# Altium PCB K60基础组.PcbDoc
Units mil, origin at the board's own origin, x right, y up, seen from the top; angles counter-clockwise.
Board outline 2675 x 1775 mil, 2 copper layers (Top Layer, Bottom Layer); 28 components, 85 nets, 225 pads, 33 vias.
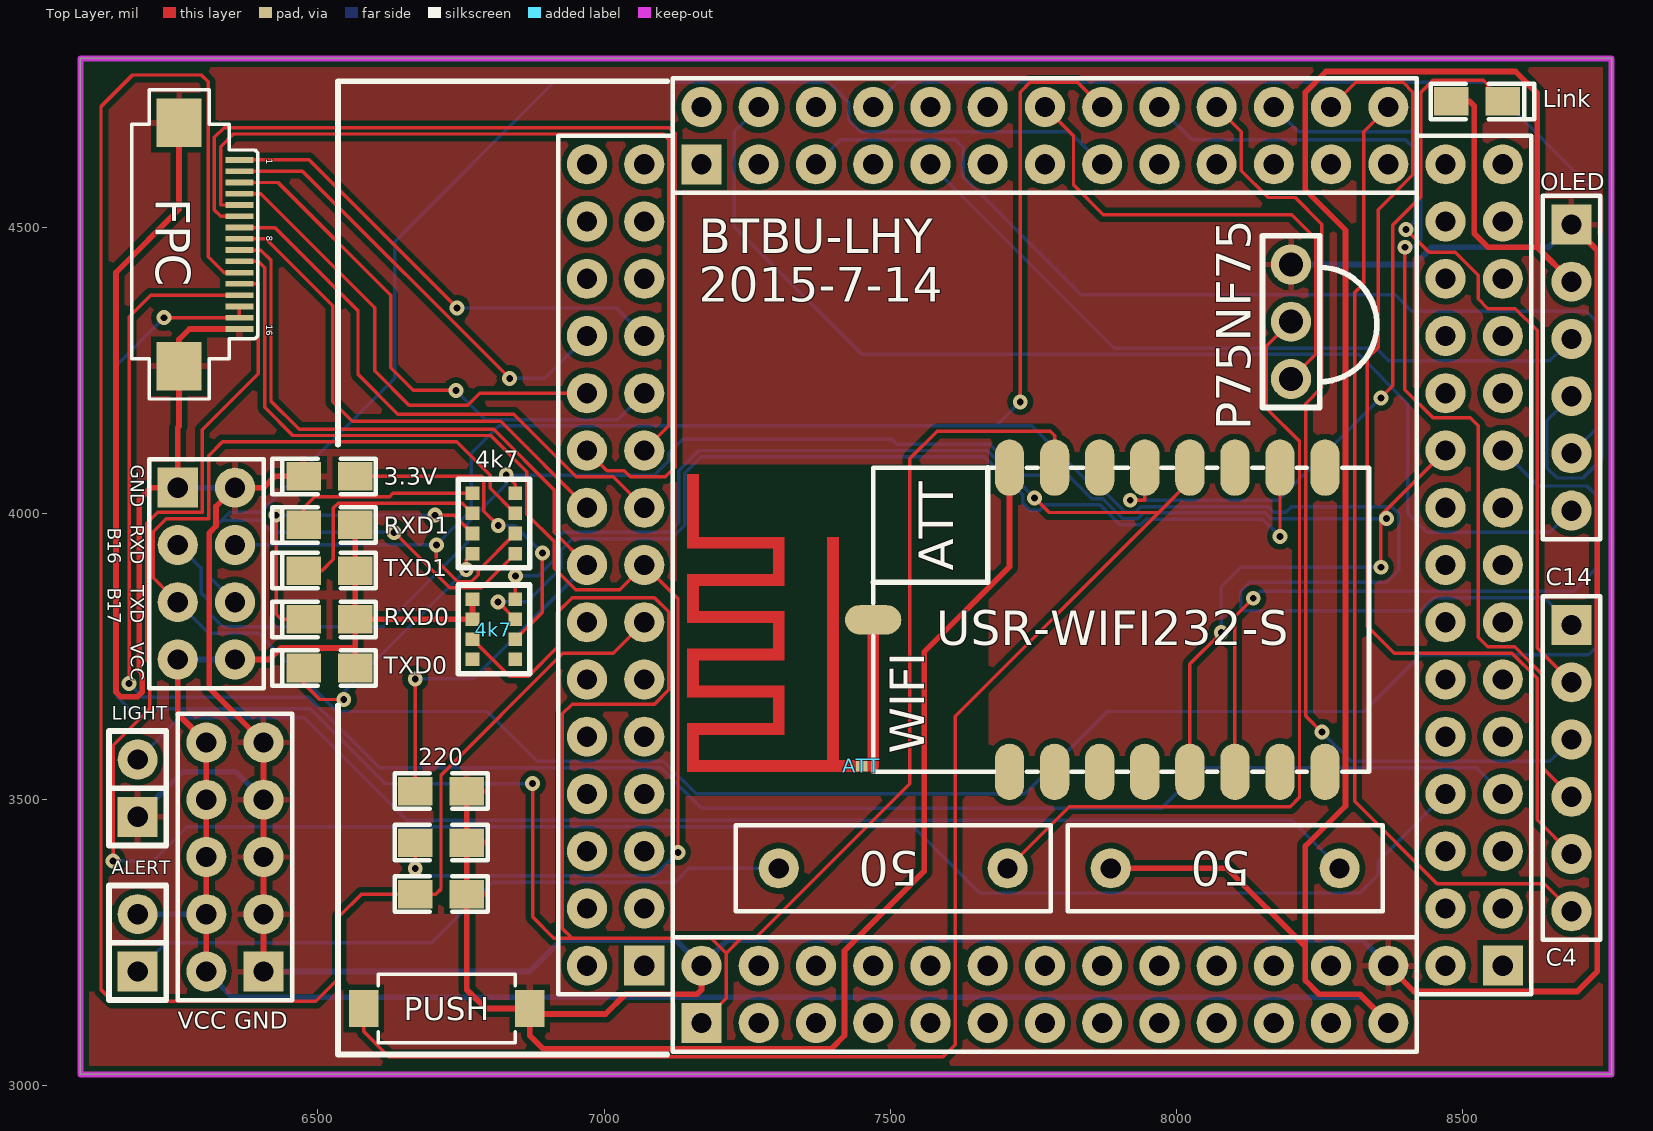
[diagram p0: Top Layer view]
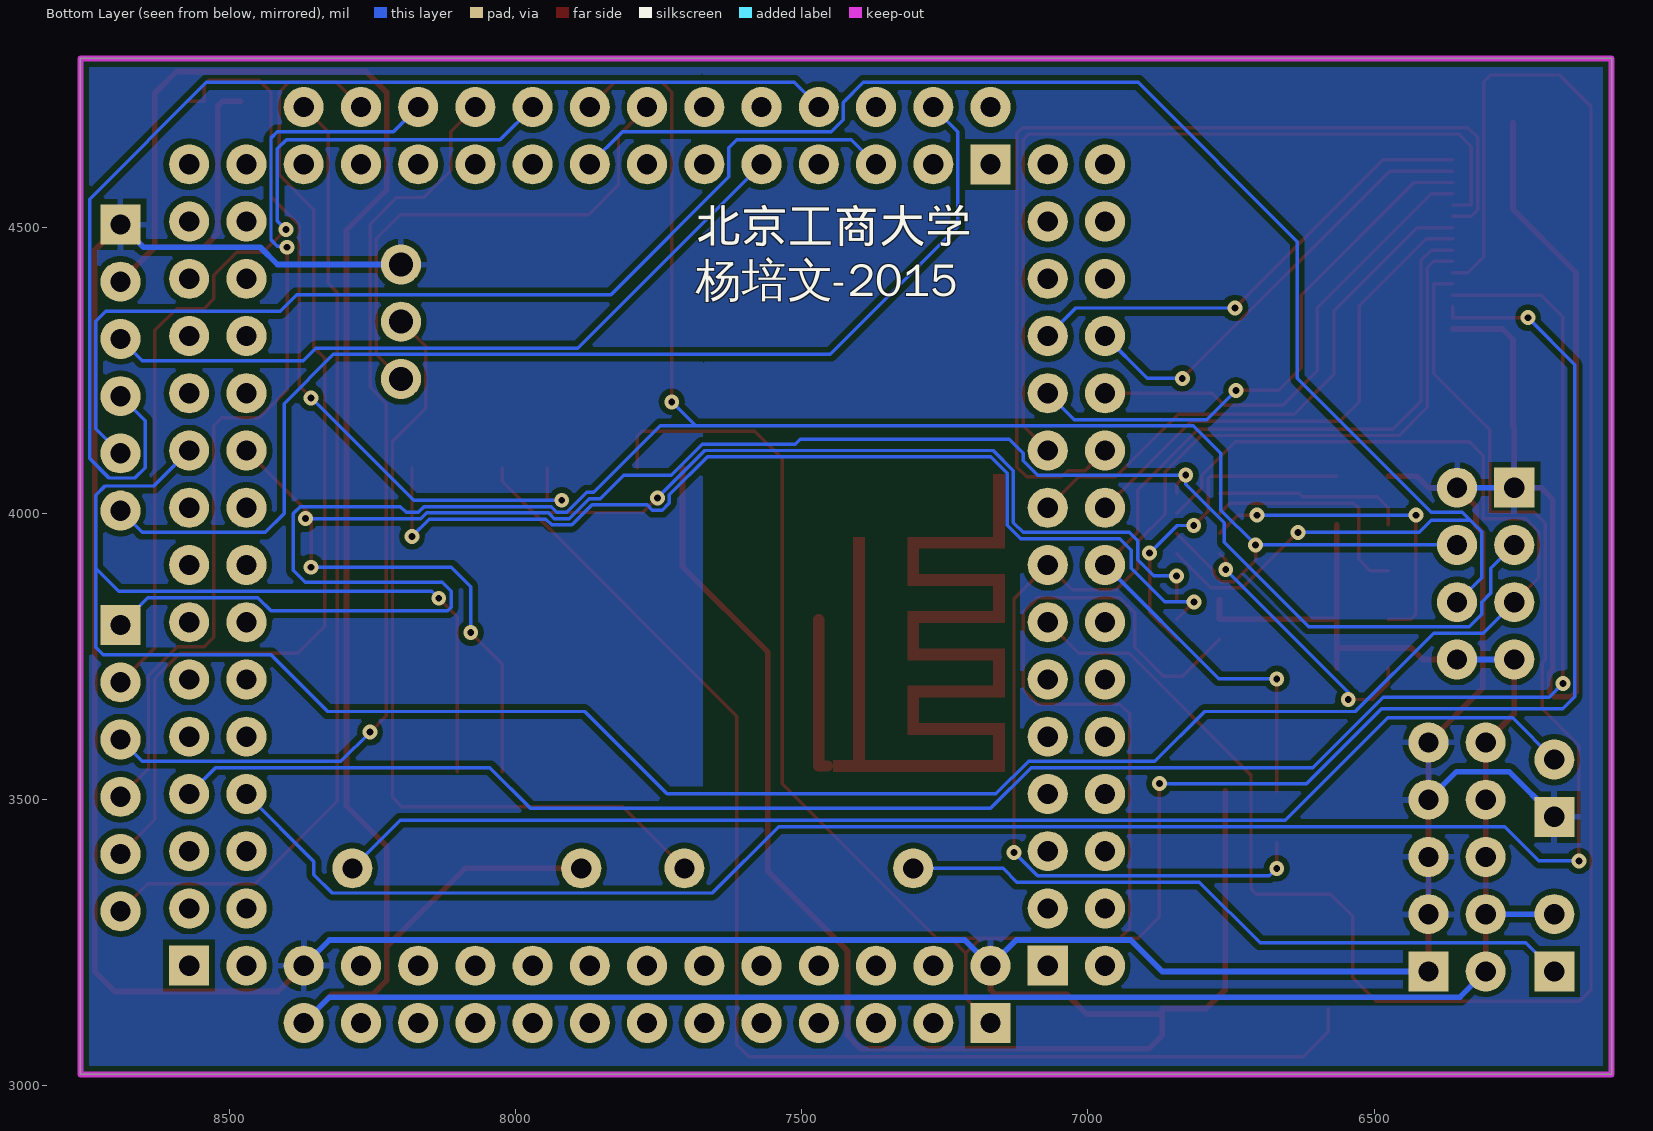
[diagram p1: Bottom Layer view, seen from below]

## Layer stack, top to bottom
Top Solder: solder mask 0.4, Solder Resist, Dk 3.5
Top Layer: signal copper 1.4
Dielectric1: dielectric 12.6, FR-4, Dk 4.8
Bottom Layer: signal copper 1.4
Bottom Solder: solder mask 0.4, Solder Resist, Dk 3.5

## Board outline
6085,3020 6085,4795 8760,4795 8760,3020

## Design rules (kind name [scope] priority, off if disabled: settings)
Clearance Clearance_1 [InNet('ANT')] p1: gap=0
Clearance [All] p2: gap=5 except(10: Arc-Poly Track-Poly SMDPad-Poly THPad-Poly Via-Poly Fill-Poly Poly-Poly)
MinimumSolderMaskSliver [All] p1: minsoldermaskwidth=3
PolygonConnect [All] p1: connectstyle=Relief reliefconductorwidth=10 reliefentries=4 polygonreliefangle="90 Angle" airgapwidth=10
RoutingVias [All] p1: holewidth=12 width=26 viastyle="Through Hole" minholewidth=12 minwidth=26 maxholewidth=12 maxwidth=26
ShortCircuit ShortCircuit_1 [InNet('ANT')] p1: allowed=TRUE
ShortCircuit [All] p2: allowed=FALSE
SilkToSilkClearance [All] p1: silktosilkclearance=0
SilkToSolderMaskClearance [IsPad] p1: minsilkscreentomaskgap=0 clearancetoexposedcopper=TRUE
SolderMaskExpansion [All] p1: expansion=4
Width ANT [InNet('ANT')] p1: maxlimit=20 minlimit=20 preferedwidth=20
Width GND [InNet('GND')] p2: maxlimit=10 minlimit=10 preferedwidth=10
Width VCC [InNet('VCC')] p3: maxlimit=10 minlimit=10 preferedwidth=10
Width [All] p4: maxlimit=10 minlimit=6 preferedwidth=6
26 further rules are at their usual default settings.

## Components (designator, comment, footprint, x,y, rotation, side; value= is the part's Value field where it differs from the comment)
3.3V "Comment" D0805 6565,4065 r180 top
4k7 "Comment" 排阻0603 6775,3930 r90 top
4k7 "Comment" 排阻0603 6775,3745 r90 top
50 "Comment" 普通电阻 8085,3380 r180 top
50 "Comment" 普通电阻 7505,3380 r180 top
220 "Comment" 0805 6670,3515 r180 top
ALERT "Comment" POWER 6185,3200 r90 top
ATT "Comment" 天线 7450,3558.84 r90 top
FPC "Comment" FPC 6310,4470 r90 top
LIGHT "Comment" POWER 6185,3470 r90 top
Link "Comment" D0805 8480,4720 r0 top
OLED "Comment" HDR1X6#1 8690,4505 r270 top
P75NF75 "TO-220" 红外接收头 8355,4455 r180 top
RXD0 "Comment" D0805 6565,3815 r180 top
RXD1 "Comment" D0805 6565,3980 r180 top
TXD0 "Comment" D0805 6565,3730 r180 top
TXD1 "Comment" D0805 6565,3900 r180 top
"VCC GND" "Comment" POWER5 6405,3200 r90 top
WIFI "Comment" USR-WIFI232-S 7470,4080 r90 top
? "Comment" HDR2X13#1 7170,3110 r0 top
? "Comment" HDR2X15#1 7070,3210 r90 top
? "Comment" HDR2X15#2 8570,3210 r90 top
? "Comment" HDR2X13#2 7170,4610 r0 top
? "Comment" UART2 6255,4045 r270 top
? "Comment" 0805 6670,3425 r180 top
? "Comment" 0805 6670,3335 r180 top
? "Comment" HDR1X6#2 8690,3805 r270 top
? "Comment" 贴片按键 6725,3135 r0 top

## Footprints (in the part's own frame and the unit in brackets; to place one, negate y for a bottom-side part, rotate by r counter-clockwise, add the part's x,y. Pads: shape width x height; smd on the part's side, far side on the other; paste and mask are expansions set on the pad)
0805 [mil]
  rect 60x50 smd: 1(0,0) 2(-90,0)
  silkscreen extent -127,-31 36,31, body extent -84,-25 -6,25, height 22
D0805 [mil]
  rect 60x50 smd: +(0,0) GND(90,0)
  silkscreen extent -36,-31 145,31, body extent 5,-25 85,25, height 43
FPC [mm] "0.5间距 抽屉式 16P"
  rect 2.159x2 smd: 0(-5.4,1.338) 0(5.4,1.338)
  rect 0.254x1.25 smd mask+0.05: 1(3.75,-1.338) 2(3.25,-1.338) 3(2.75,-1.338) 4(2.25,-1.338) 5(1.75,-1.338) 6(1.25,-1.338) 7(0.75,-1.338) 8(0.25,-1.338) 9(-0.25,-1.338) 10(-0.75,-1.338) 11(-1.25,-1.338) 12(-1.75,-1.338) 13(-2.25,-1.338) 14(-2.75,-1.338) 15(-3.25,-1.338) 16(-3.75,-1.338)
  silkscreen extent -6.86,-2.16 6.86,3.43, body extent -4.87,-0.63 5.13,3.18, height 0.82
HDR1X6#1 [mil] "Connector; Header; 6 Position"
  round 70 hole 35.43: 5(400,0) 6(500,0) D0(200,0) D1(300,0) VCC(100,0)
  rect 70x70 hole 35.43: GND(0,0)
  silkscreen extent -50,-50 550,50
HDR1X6#2 [mil] "Connector; Header; 6 Position"
  rect 70x70 hole 35.43: 1(0,0)
  round 70 hole 35.43: 2(100,0) 3(200,0) 4(300,0) 5(400,0) 6(500,0)
  silkscreen extent -50,-50 550,50
HDR2X13#1 [mil] "Connector; Header; 13x2 Position"
  rect 70x70 hole 35.43: 3.3(0,0)
  round 70 hole 35.43: A4(500,100) A5(500,0) A6(600,100) A7(600,0) A8(700,100) A9(700,0) A10(800,100) A11(800,0) A12(900,100) A13(900,0) A14(1000,100) A15(1000,0) A16(1100,100) A17(1100,0) DAC0(100,100) DAC1(100,0) E24(200,0) E25(300,100) E26(300,0) E27(400,100) E28(400,0) GND(0,100) GND(1200,100) VBAT(200,100) VCC(1200,0)
  silkscreen extent -50,-50 1250,150
HDR2X13#2 [mil] "Connector; Header; 13x2 Position"
  round 70 hole 35.43: C4(1200,100) C5(1200,0) C6(1100,100) C7(1100,0) C8(1000,100) C9(1000,0) C10(900,100) C11(900,0) C12(800,100) C13(800,0) C14(700,100) C15(700,0) C16(600,100) C17(600,0) C18(500,100) C19(500,0) D0(400,100) D1(400,0) D2(300,100) D3(300,0) D4(200,100) D5(200,0) D6(100,100) D7(100,0) D8(0,100)
  rect 70x70 hole 35.43: D9(0,0)
  silkscreen extent -50,-50 1250,150
HDR2X15#1 [mil] "Connector; Header; 15x2 Position"
  round 70 hole 35.43: 0S16(0,100) AD0DM0(200,100) AD0DM1(400,100) AD0DP0(300,0) AD0DP1(500,0) AD1DM0(100,100) AD1DM1(300,100) AD1DP1(400,0) AD1DP6(200,0) AD1S16(100,0) D10(1400,0) D11(1400,100) D12(1300,0) D13(1300,100) D14(1200,0) D15(1200,100) E0(1100,0) E1(1100,100) E2(1000,0) E3(1000,100) E4(900,0) E5(900,100) E6(800,0) E7(800,100) E8(700,0) E9(700,100) E10(600,0) E11(600,100) E12(500,100)
  rect 70x70 hole 35.43: 1S16(0,0)
  silkscreen extent -50,-50 1450,150
HDR2X15#2 [mil] "Connector; Header; 15x2 Position"
  round 70 hole 35.43: A24(0,100) A26(100,100) A27(100,0) A28(200,100) A29(200,0) B0(300,100) B1(300,0) B2(400,100) B3(400,0) B4(500,100) B5(500,0) B6(600,100) B7(600,0) B8(700,100) B9(700,0) B10(800,100) B11(800,0) B16(900,100) B17(900,0) B18(1000,100) B19(1000,0) B20(1100,100) B21(1100,0) B22(1200,100) B23(1200,0) C0(1300,0) C1(1300,100) C2(1400,0) C3(1400,100)
  rect 70x70 hole 35.43: A25(0,0)
  silkscreen extent -50,-50 1450,150
POWER [mil]
  rect 70x70 hole 35.43: GND(0,0)
  round 70 hole 35.43: VCC(100,0)
  silkscreen extent -50,-50 150,50, body extent -50,-50 150,50, height 336
POWER5 [mil] "Connector; Header; 5x2 Position"
  rect 70x70 hole 35.43: 1(0,0)
  round 70 hole 35.43: 2(0,100) 3(100,0) 4(100,100) 5(200,0) 6(200,100) 7(300,0) 8(300,100) 9(400,0) 10(400,100)
  silkscreen extent -50,-50 450,150, body extent -50,-50 450,150, height 336
UART2 [mil] "Connector; Header; 4x2 Position"
  rect 70x70 hole 35.43: 1(0,0)
  round 70 hole 35.43: 2(0,100) 3(100,0) 4(100,100) 5(200,0) 6(200,100) 7(300,0) 8(300,100)
  silkscreen extent -50,-50 350,150, body extent -50,-50 350,150, height 336
USR-WIFI232-S [mm]
  oval 2.5x1.3 smd: 1(-13.5,-6.051) 2(-13.5,-8.051) 3(-13.5,-10.051) 4(-13.5,-12.051) 7(-13.5,-18.051) 8(-13.5,-20.051) DVDD(0,-8.051) GND(0,-6.051) GPIO9(0,-20.051) NLINK(0,-12.051) READY(0,-16.051) RELOAD(0,-14.051) RESET(0,-18.051) RXD(-13.5,-16.051) TXD(-13.5,-14.051) WPS(0,-10.051)
  oval 1.3x2.5 smd: 17(-6.75,0)
  silkscreen extent -13.5,-22 0,0, body extent -13.46,-21.97 0,0, height 4.2
天线 [mm]
  rect 0.5x0.5 smd: 1(0,0)
  Top Layer region: -0.254,7.747 -0.254,0.127 0.254,0.127 0.254,1.016 10.16,1.016 10.16,1.524 0.254,1.524 0.254,7.239 1.397,7.239 1.397,3.429 3.556,3.429 3.556,7.239 4.699,7.239 4.699,3.429 6.858,3.429 6.858,7.239 8.001,7.239 8.001,3.429 10.16,3.429 10.16,7.239 12.954,7.239 12.954,7.747 9.652,7.747 9.652,3.937 8.509,3.937 8.509,7.747 6.35,7.747 6.35,3.937 5.207,3.937 5.207,7.747 3.048,7.747 3.048,3.937 1.905,3.937 1.905,7.747
排阻0603 [mm]
  rect 0.6x0.6 smd: 1(0,-1.778) 2(0,0.127) 3(0.889,-1.778) 4(0.889,0.127) 5(1.778,-1.778) 6(1.778,0.127) 7(2.667,-1.778) 8(2.667,0.127)
  silkscreen extent -0.64,-2.41 3.3,0.76, body extent -0.25,-1.6 2.92,0, height 0.55
普通电阻 [mil] "Radial Cap, Thru-Hole; 2 Leads; 0.4 in Pin Spacing"
  round 70 hole 35: 1(-200,0) 2(200,0)
  silkscreen extent -275,-75 275,75, body extent -214,-50 214,50, height 129
红外接收头 [mil]
  round 70 hole 42: D(155,120) G(155,220) S(155,20)
  silkscreen extent 5,-30 205,270, body extent 94,-85 306,314, height 787
贴片按键 [mil]
  rect 51.18x65 smd: 1(145,0) 2(-145,0)
  silkscreen extent -120,-60 120,60, body extent -130,-65 130,61, height 75

## Via types
v1: diameter 26, hole 12, Top Layer to Bottom Layer, tented both sides, 33 vias

## Nets (pads, with @x,y where several pads share a name; then routed paths per layer and width w, separated by ;. In a path a pad name is that pad's centre, name@x,y a point inside that pad or via, vN(x,y) a via of type N, cw(c..) or ccw(c..) an arc to the next point about the centre after c; other vN are vias at no path point)
3.3: 4k7.4@6770,3780 ?.3.3 FPC.14 FPC.15 WIFI.DVDD | length 4979.7
  Top Layer w6: v1(6231.05,4342.05) FPC.15 FPC.14 ; 4k7.4@6770,3780 6834,3716 6868,3716 6918,3766 6918,3827 6944,3853 7088,3853 7113,3828 7113,3692 7088,3667 6944,3667 6927,3650 6927,3275 6944,3258 ; v1(6875,3528) 6875,3295 6912,3258 6944,3258 ; ?.3.3 7213,3153 7213,3232 ; WIFI.DVDD 7786.96,4136 7778.96,4144 7582,4144 7534,4096 7534,3528 7264,3258 7239,3258 ; 6944,3258 7187,3258 ; 7187,3258 7239,3258 ; 7187,3258 7213,3232 ; 7213,3232 7239,3258
  Bottom Layer w6: v1(6231.05,4342.05) 6149,4260 6149,3680 6170,3659 6487,3659 6618,3528 v1(6875,3528)
A4: ?.A4
A5: ?.A5
A6: ?.A6
A7: ?.A7
A8: ?.A8
A9: ?.A9
A10: ?.A10
A11: ?.A11
A12: ?.A12
A13: ?.A13
A14: ?.A14
A15: ?.A15
A16: ?.A16
A17: ?.A17
ALERT: 50.2@7305,3380 ALERT.GND | length 1194.6
  Bottom Layer w6: ALERT.GND 6235,3250 6699,3250 6805,3356 7124,3356 7148,3380 50.2@7305,3380
ALERT2: 50.1@7705,3380 P75NF75.D | length 1433.9
  Top Layer w6: 50.1@7705,3380 7812.81,3487.81 8198.62,3487.81 8214.81,3504 8214.81,4126.19 8157,4184 8157,4292 P75NF75.D
ANT: ATT.1 WIFI.17 | length 270.4
  Top Layer w20: ATT.1@7455,3558.84 7470,3558.84 WIFI.17
B0: ?.B0 FPC.12 | length 3682.5
  Top Layer w6: v1(6142,3393) 6142,3595 6206,3659 6206,3739 6201,3744 6201,3983 6220,4002 6298,4002 6298,4146 6396,4244 6396,4401.1 FPC.12
  Bottom Layer w6: v1(6142,3393) 6212,3393 6272,3453 7540,3453 7656,3337 8320,3337 8352,3369 8352,3392 ?.B0
B1: ?.B1 FPC.13 | length 3387.6
  Top Layer w6: v1(6170,3703) 6170,4343.42 6208,4381.42 FPC.13
  Bottom Layer w6: v1(6170,3703) 6194,3679 6484,3679 6607,3556 7099,3556 7170,3485 7973.75,3485 8044.75,3556 8524,3556 ?.B1
B2: ?.B2
B3: ?.B3
B4: ?.B4
B5: ?.B5
B6: ?.B6
B7: ?.B7
B8: ?.B8
B9: ?.B9
B10: ?.B10
B11: ?.B11
B16: 4k7.7@6845,4035 ?.3@6255,3945 ?.B16 WIFI.TXD | length 3392.3
  Top Layer w6: v1(6829,4067) 6845,4051 4k7.7@6845,4035 ; WIFI.TXD 8023.18,3737 v1(8078,3791.82) ; v1(8357,3906) 8357,3997 8367,4007 ; v1(8367,3991) 8367,4007 ; ?.B16 8367,4007
  Bottom Layer w6: ?.3@6255,3945 6296,3904 6296,3861 6312,3845 6312,3824 6334,3802 6614,3802 6761.94,3949.94 6761.94,3983.94 6829,4051 v1(6829,4067) 7087.81,4067 7113,4092.19 7113,4105.5 7137.5,4130 7502.5,4130 7511.5,4121 7673.56,4121 7727.56,4067 7811,4067 7852,4026 7870.75,4026 7905.75,3991 7932.25,3991 7942.25,4001 8155.22,4001 8165.22,3991 v1(8367,3991) ; v1(8078,3791.82) 8078,3872 8112,3906 v1(8357,3906)
B17: 4k7.5@6845,4000 ?.5@6255,3845 ?.B17 WIFI.RXD | length 5089.9
  Top Layer w6: ?.5@6255,3845 6212,3888 6212,3968 6235,3991 6309,3991 6309,4101 6333.22,4125.22 6742.29,4125.22 6800.81,4066.7 6800.81,4044.19 4k7.5@6845,4000 ; WIFI.RXD 8101.92,3819.92 v1(8133.92,3851.92)
  Bottom Layer w6: ?.5@6255,3845 6309,3791 6396,3791 6533,3654 6796,3654 6883,3567 6987.81,3567 7103.56,3567 7160.56,3510 7735.25,3510 7879.25,3654 8328,3654 8427,3753 8720,3753 8733,3766 8733,3904 ; v1(8133.92,3851.92) 8146,3864 8693,3864 8733,3904 ; ?.B17 8632,4048 8717,4048 8733,4032 8733,3904
C0: ?.C0
C1: ?.C1
C2: ?.C2
C3: ?.C3
C4: ?.6@8690,3305 ?.C4 | length 1696
  Top Layer w6: ?.C4 8327,4667 8327,4402 8311,4386 8311,3497 8455,3353 8642,3353 ?.6@8690,3305
C5: ?.C5
C6: ?.5@8690,3405 ?.C6 | length 1800.5
  Top Layer w6: ?.C6 8313,4753 8396,4753 8413,4736 8413,4591.73 8352,4530.73 8352,4290 8333,4271 8333,3803 8380,3756 8586,3756 8630,3712 8630,3465 ?.5@8690,3405
C7: 
C8: ?.4@8690,3505 ?.C8 | length 1636.6
  Top Layer w6: v1(8399,4465) 8399,4216 8448,4167 8513,4167 8527,4153 8527,3784 8544,3767 8590.56,3767 8641,3716.56 8641,3554 ?.4@8690,3505
  Bottom Layer w6: ?.C8 8213,4667 8416,4667 8427,4656 8427,4478 8416,4467 8401,4467 v1(8399,4465)
C9: ?.C9
C10: ?.3@8690,3605 ?.C10 | length 1692
  Top Layer w6: ?.C10 8113,4667 8113,4599 8160,4552 8207,4552 8254,4505 8254,4220.19 8225.81,4192 8225.81,3646.19 v1(8254,3618)
  Bottom Layer w6: v1(8254,3618) 8305,3567 8652,3567 ?.3@8690,3605
C11: ?.C11
C12: ?.2@8690,3705 ?.C12 | length 1589.2
  Top Layer w6: v1(8401,4496) 8441,4456 8487,4456 8527,4416 8527,4375 8544,4358 8592,4358 8630,4320 8630,3765 ?.2@8690,3705
  Bottom Layer w6: ?.C12 8027,4653 8400,4653 8416,4637 8416,4511 v1(8401,4496)
C13: ?.C13
C14: 4k7.3@6845,3965 ?.1@8690,3805 ?.4@6355,3945 ?.C14 | length 4272.8
  Top Layer w6: v1(6707,3945) 6707,3918 6744,3881 6768,3881 6780,3893 6780,3900 4k7.3@6845,3965 ; v1(7727,4195) 7727,4736 7744,4753 7827,4753 ?.C14
  Bottom Layer w6: ?.4@6355,3945 v1(6707,3945) 6768,4006 6768,4105 6816,4153 7685,4153 ; v1(7727,4195) 7685,4153 ; ?.1@8690,3805 8642,3853 8450,3853 8427,3830 8118,3830 8112,3836 8112,3864 8128,3880 8367,3880 8388,3901 8388,4000 8376,4012 8201,4012 8191,4002 8169.77,4002 8159.77,4012 7937.7,4012 7927.7,4002 7910.3,4002 7875.3,4037 7863,4037 7747,4153 7685,4153
C15: 4k7.1@6845,3930 ?.6@6355,3845 ?.C15 | length 2827.5
  Top Layer w6: v1(6633,3967) 6730,3870 6785,3870 4k7.1@6845,3930
  Bottom Layer w6: ?.6@6355,3845 6312,3888 6312,3968 6332,3988 ; v1(6633,3967) 6421,3967 6400,3988 6332,3988 ; ?.C15 7813,4667 7448,4667 7427,4688 7427,4718 7392,4753 6912,4753 6634,4475 6634,4236 6400,4002 6346,4002 6332,3988
C16: ?.C16 P75NF75.G | length 881.5
  Top Layer w6: ?.C16 7820,4660 7820,4574 7872,4522 8201,4522 8243,4480 8243,4278 P75NF75.G
C17: ?.C17
C18: ?.C18
C19: ?.C19
CAMPULL: 
D0: ?.D0
D1: ?.D1 OLED.D0 | length 1277.8
  Bottom Layer w6: ?.D1 7891,4289 8349,4289 8371,4267 8652,4267 OLED.D0
D2: ?.D2 OLED.D1 | length 2090.7
  Bottom Layer w6: ?.D2 7513,4753 8540,4753 8744,4549 8744,4096 8710,4062 8665,4062 8647,4080 8647,4162 OLED.D1
D3: ?.D3
D4: ?.D4
D5: ?.D5 OLED.5 | length 1790.8
  Bottom Layer w6: ?.D5 7413,4653 7613,4653 7627,4639 7627,4588 7833,4382 8382,4382 8411,4353 8716,4353 8733,4336 8733,4148 OLED.5
D6: ?.D6 OLED.6 | length 2039.2
  Bottom Layer w6: ?.D6 7227,4667 7227,4501 7450,4278 8318,4278 8404,4192 8404,4000 8437,3967 8652,3967 OLED.6
D7: ?.D7
D8: ?.D8
D9: ?.D9
E0: ?.E0 FPC.1 | length 834.8
  Top Layer w6: FPC.1 6484.36,4617.64 v1(6743,4359)
  Bottom Layer w6: v1(6743,4359) 7021,4359 ?.E0
E1: ?.E1 FPC.2 | length 787.9
  Top Layer w6: FPC.2 6473,4597.95 v1(6834.95,4236)
  Bottom Layer w6: v1(6834.95,4236) 6896,4236 ?.E1
E2: ?.E2 FPC.3 | length 972.2
  Top Layer w6: FPC.3 6430.23,4578.27 6627,4381.5 6627,4254.78 6666.78,4215 v1(6741,4215)
  Bottom Layer w6: v1(6741,4215) 6792,4164 7024,4164 ?.E2
E3: ?.E3 FPC.4 | length 833.9
  Top Layer w6: FPC.4 6400,4558.58 6599,4359.58 6599,4249 6659,4189 6762,4189 6783,4210 ?.E3
E4: ?.E4 FPC.5 | length 1491.8
  Top Layer w6: FPC.5 6330,4538.9 6330,4641 6352,4663 7103,4663 7113,4653 7113,4153 ?.E4
E5: ?.E5 FPC.6 | length 1754.3
  Top Layer w6: FPC.6 6330,4519.21 6319,4530.21 6319,4657 6336,4674 7114,4674 7124,4664 7124,4081 7107,4064 7046,4064 7035,4075 7005,4075 ?.E5
E6: ?.E6 FPC.7 | length 975.4
  Top Layer w6: FPC.7 6425,4499.53 6570,4354.53 6570,4243 6639.72,4173.28 6841.72,4173.28 6951,4064 7016,4064 ?.E6
E7: ?.E7 FPC.8 | length 900.3
  Top Layer w6: FPC.8 6409,4479.84 6526,4362.84 6526,4195 6560,4161 6819,4161 ?.E7
E8: ?.1@6670,3425 ?.E8 FPC.10 | length 2229.5
  Top Layer w6: FPC.10 6396,4440.47 6407,4429.47 6407,4185.22 6456,4136.22 6801.78,4136.22 6865,4073 6865,3999 6913,3951 6913,3904 6950,3867 7027,3867 ?.E8 7129,3851 v1(7129,3408) ; v1(6670,3380) ?.1@6670,3425
  Bottom Layer w6: v1(6670,3380) 6683,3367 7088,3367 v1(7129,3408)
E9: 220.1 ?.E9 FPC.9 | length 1601.1
  Top Layer w6: FPC.9 6400,4460.16 6418,4442.16 6418,4196.22 6467,4147.22 6806.78,4147.22 6913,4041 6913,3967 ?.E9 ; 220.1 v1(6670,3711)
  Bottom Layer w6: v1(6670,3711) 6771,3711 ?.E9
E10: ?.1@6670,3335 ?.E10 FPC.11 | length 3540
  Top Layer w6: FPC.11 6336,4420.79 6308,4448.79 6308,4754 6296,4766 6176,4766 6121,4711 6121,3168 6141,3148 6496,3148 6537,3189 6537,3296 6576,3335 6670,3335 6706,3335 6715,3344 6715,3543 6928,3756 7016,3756 ?.E10
GND: 3.3V.GND 220.2 "VCC GND.1" "VCC GND.3" "VCC GND.5" "VCC GND.7" "VCC GND.9" ?.1@6255,4045 ?.1@6870,3135 ?.2@6355,4045 ?.2@6760,3335 ?.2@6760,3425 ?.GND FPC.0 FPC.16 LIGHT.GND OLED.GND P75NF75.S WIFI.GND | length 10126.7
  Top Layer w10: FPC.0@6257.34,4682.6 6257.34,4531.34 6147,4421 6147,3688 6155,3680 6185,3680 6193,3688 6193,3721 6188,3726 6188,4025 6208,4045 6255,4045 6255,4150 6257.34,4152.34 6257.34,4257.4 6257.34,4304 6275.7,4322.36 FPC.16 ; 6405,3200 6405,3300 6405,3400 6405,3500 6405,3600 6310,3695 6310,3966 6322,3978 6322,4012 6355,4045 6405,4045 6425,4065 3.3V.GND ; 220.2 6760,3425 6760,3335 6760,3168 6793,3135 6870,3135 ?.1@6870,3125.46 ; ?.GND@7170,3210 7170,3168 7162,3160 7036.7,3160 7002.15,3125.46 ?.1@6870,3125.46 ; WIFI.GND 7708.22,3907 7559,3757.78 7559,3375 7420,3236 7420,3088 7397,3065 6893,3065 6870,3088 ?.1@6870,3125.46 ; ?.GND@8370,3210 8415,3165 8700,3165 8735,3200 8735,4460 OLED.GND
  Bottom Layer w10: LIGHT.GND 6264,3549 6356,3549 6405,3500 ; ?.1@6255,4045 ?.2@6355,4045 ; 6405,3200 6870,3200 6925,3255 7125,3255 7170,3210 7215,3255 8325,3255 ?.GND@8370,3210 ; P75NF75.S 8415.86,4435 8445.86,4465 8650,4465 OLED.GND
LED-3.3: 3.3V.+ 4k7.3@6845,3780 | length 586.4
  Top Layer w6: 3.3V.+ 6786,4065 6789.81,4061.19 6789.81,4004.19 v1(6815,3979) ; 4k7.3@6845,3780 6892,3827 v1(6892,3931)
  Bottom Layer w6: v1(6815,3979) 6844,3979 v1(6892,3931)
LED-RXD0: 4k7.4@6770,3965 RXD0.GND | length 581
  Top Layer w6: v1(6427,3997) 6427,3824 6436,3815 RXD0.GND ; v1(6704.61,3997) 6738,3997 4k7.4@6770,3965
  Bottom Layer w6: v1(6427,3997) v1(6704.61,3997)
LED-RXD1: 4k7.8@6770,4035 RXD1.GND | length 335.4
  Top Layer w6: RXD1.GND 6475,4010 6494.55,4029.55 6625.55,4029.55 6631,4035 4k7.8@6770,4035
LED-TXD0: 4k7.2@6770,3930 TXD0.GND | length 456.8
  Top Layer w6: TXD0.GND 6475,3703 6503,3675 v1(6545,3675) ; v1(6759,3902) 6759,3919 4k7.2@6770,3930
  Bottom Layer w6: v1(6545,3675) 6545,3688 v1(6759,3902)
LED-TXD1: 4k7.6@6770,4000 TXD1.GND | length 403.8
  Top Layer w6: TXD1.GND 6507,3900 6527,3920 6527,4009.55 6535.45,4018 6752,4018 4k7.6@6770,4000
LIGHT: 50.1@8285,3380 LIGHT.VCC | length 2239.2
  Bottom Layer w6: LIGHT.VCC 6258,3643 6475.81,3643 6654.81,3464 8201,3464 50.1@8285,3380
VCC: 4k7.6@6770,3815 4k7.8@6770,3850 50.2@7885,3380 "VCC GND.2" "VCC GND.4" "VCC GND.6" "VCC GND.8" "VCC GND.10" ?.7 ?.8 ?.VCC ALERT.VCC Link.+ OLED.VCC RXD0.+ RXD1.+ TXD0.+ TXD1.+ | length 6954.4
  Top Layer w10: ?.7 6255,3650 6305,3600 6305,3500 6305,3400 6305,3300 6305,3200 ; ?.8 6415,3745 6435,3765 6565,3765 ; TXD0.+ 6565,3765 ; RXD1.+ TXD1.+ RXD0.+ ; 4k7.8@6770,3850 6770,3815 RXD0.+ ; 50.2@7885,3380 8088,3380 8225,3243 ; ?.VCC 8320,3160 8249,3160 8225,3184 8225,3243 ; Link.+ 8512,4720 8520,4712 8520,4489 8544,4465 8630,4465 ; OLED.VCC 8630,4465 ; 6565,3765 RXD0.+ ; 8225,3243 8225,3419 8295,3489 8295,4495 8225,4565 8225,4736 8261,4772 8592,4772 8630,4734 8630,4465
  Bottom Layer w10: ALERT.VCC 6305,3300 ; ?.7 ?.8 ; 6305,3200 6350,3155 8325,3155 ?.VCC
WIFI-LINK: Link.GND WIFI.NLINK | length 1341.6
  Top Layer w6: v1(7919,4023) 7944.44,4023 WIFI.NLINK ; v1(8357,4202) 8378,4223 8378,4504 8427,4553 8427,4736 8448,4757 8536,4757 8544,4749 8544,4720 Link.GND
  Bottom Layer w6: v1(7919,4023) 8178,4023 v1(8357,4202)
WIFI-RELOAD: 4k7.7@6845,3850 ?.2@6580,3135 WIFI.RELOAD | length 3650.9
  Top Layer w6: ?.2@6580,3135 6580,3095 6624,3051 7592,3051 7613,3072 7613,3645.82 7968.88,4001.7 ; 4k7.7@6845,3850 v1(6845,3891) ; v1(7752,4027) 7777.3,4001.7 7968.88,4001.7 ; WIFI.RELOAD 8023.18,4056 7968.88,4001.7
  Bottom Layer w6: v1(6845,3891) 6885,3891 6913,3919 6913,3952 6928,3967 7113,3967 7130,3984 7130,4075 7165,4110 7669,4110 v1(7752,4027)
WIFI-RESET: 4k7.5@6845,3815 WIFI.RESET | length 1787.9
  Top Layer w6: v1(6814.5,3845.5) 4k7.5@6845,3815 ; v1(8180.66,3960) WIFI.RESET
  Bottom Layer w6: v1(6814.5,3845.5) 6865.5,3845.5 6924,3904 6924,3936 6944,3956 7117.56,3956 7141,3979.44 7141,4070.44 7169.56,4099 7664.44,4099 7731,4032.44 7731,4018.3 7743.3,4006 7760.7,4006 7769.7,4015 7866.19,4015 7901.19,3980 7936.81,3980 7946.81,3990 8150.66,3990 v1(8180.66,3960)
pads on no net: 4k7.1@6845,3745 4k7.2@6770,3745 ?.0S16 ?.1S16 ?.A24 ?.A25 ?.A26 ?.A27 ?.A28 ?.A29 ?.AD0DM0 ?.AD0DM1 ?.AD0DP0 ?.AD0DP1 ?.AD1DM0 ?.AD1DM1 ?.AD1DP1 ?.AD1DP6 ?.AD1S16 ?.B18 ?.B19 ?.B20 ?.B21 ?.B22 ?.B23 ?.C7 ?.D10 ?.D11 ?.D12 ?.D13 ?.D14 ?.D15 ?.DAC0 ?.DAC1 ?.E11 ?.E12 ?.E24 ?.E25 ?.E26 ?.E27 ?.E28 ?.VBAT WIFI.1 WIFI.2 WIFI.3 WIFI.4 WIFI.7 WIFI.8 WIFI.GPIO9 WIFI.READY WIFI.WPS

## Polygon pours and split planes (outlines as drawn)
GND on Bottom Layer "VCC-No Net" (solid, pour order 4): 6085,4795 6085,3020 8760,3020 8760,4795 7672.93,4795 7672.93,3511.24 7117.93,3511.24 7117.93,4085.95 7672.93,4085.95 7672.93,4795
GND on Top Layer "VCC-No Net" (solid, pour order 3): 6085.76,4792.24 6085.76,3017.24 8760.76,3017.24 8760.76,4792.24 7672.13,4792.24 7672.13,3505.87 7127.13,3505.87 7127.13,4085.87 7672.13,4085.87 7672.13,4792.24

## Keep-outs
Keep-Out Layer:
  the board outline again, w10

## Silkscreen, mask and mechanical layers (free items; w line width, h text height)
Top Overlay:
  lines w10: 6535,3665 6535,3055 7110,3055 ; 6535,4120 6535,4755 7110,4755
  text "BTBU-LHY" at 7165,4455 h60
  text "2015-7-14" at 7165,4370 h60
  text "GND" at 6165,4085 h40 r270
  text "RXD" at 6165,3980 h40 r270
  text "B16" at 6125,3975 h40 r270
  text "TXD" at 6165,3875 h40 r270
  text "C14" at 8645,3875 h30
  text "B17" at 6125,3870 h40 r270
  text "VCC" at 6165,3775 h40 r270
  text "C4" at 8645,3210 h30
Bottom Overlay:
  text "北京工商大学" at 7685,4455 h100
  text "杨培文-2015" at 7685,4360 h100

## Text inside footprints (layer, text, board x,y; h text height)
FPC: Top Overlay "1" at 6405,4620 h20 r270; Top Overlay "8" at 6405,4485 h20 r270; Top Overlay "16" at 6405,4330 h20 r270
WIFI: Top Overlay "USR-WIFI232-S" at 7580,3770 h60; Top Overlay "ATT" at 7610,3900 h60 r90
?: Top Overlay "PUSH" at 6650,3115 h40